# EAGLE board 00A-110-A (EAGLE 9.6.2)
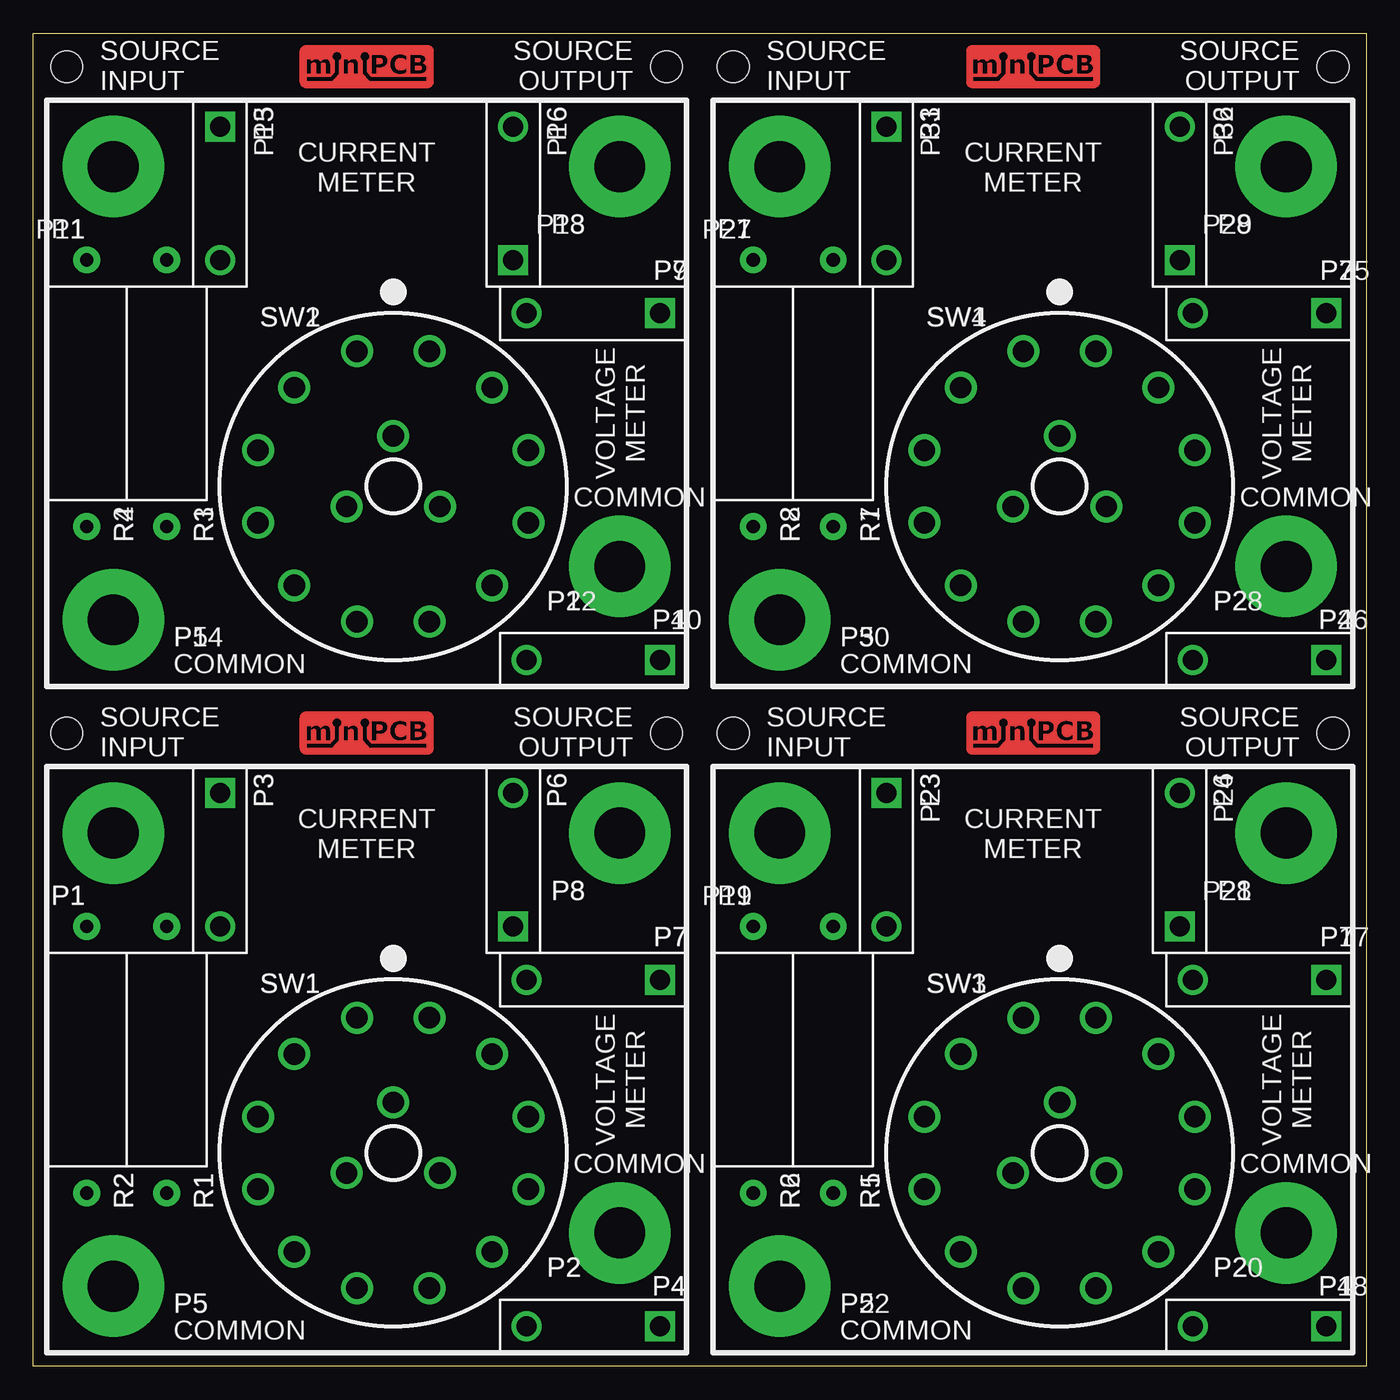
[diagram p0: board, top side]
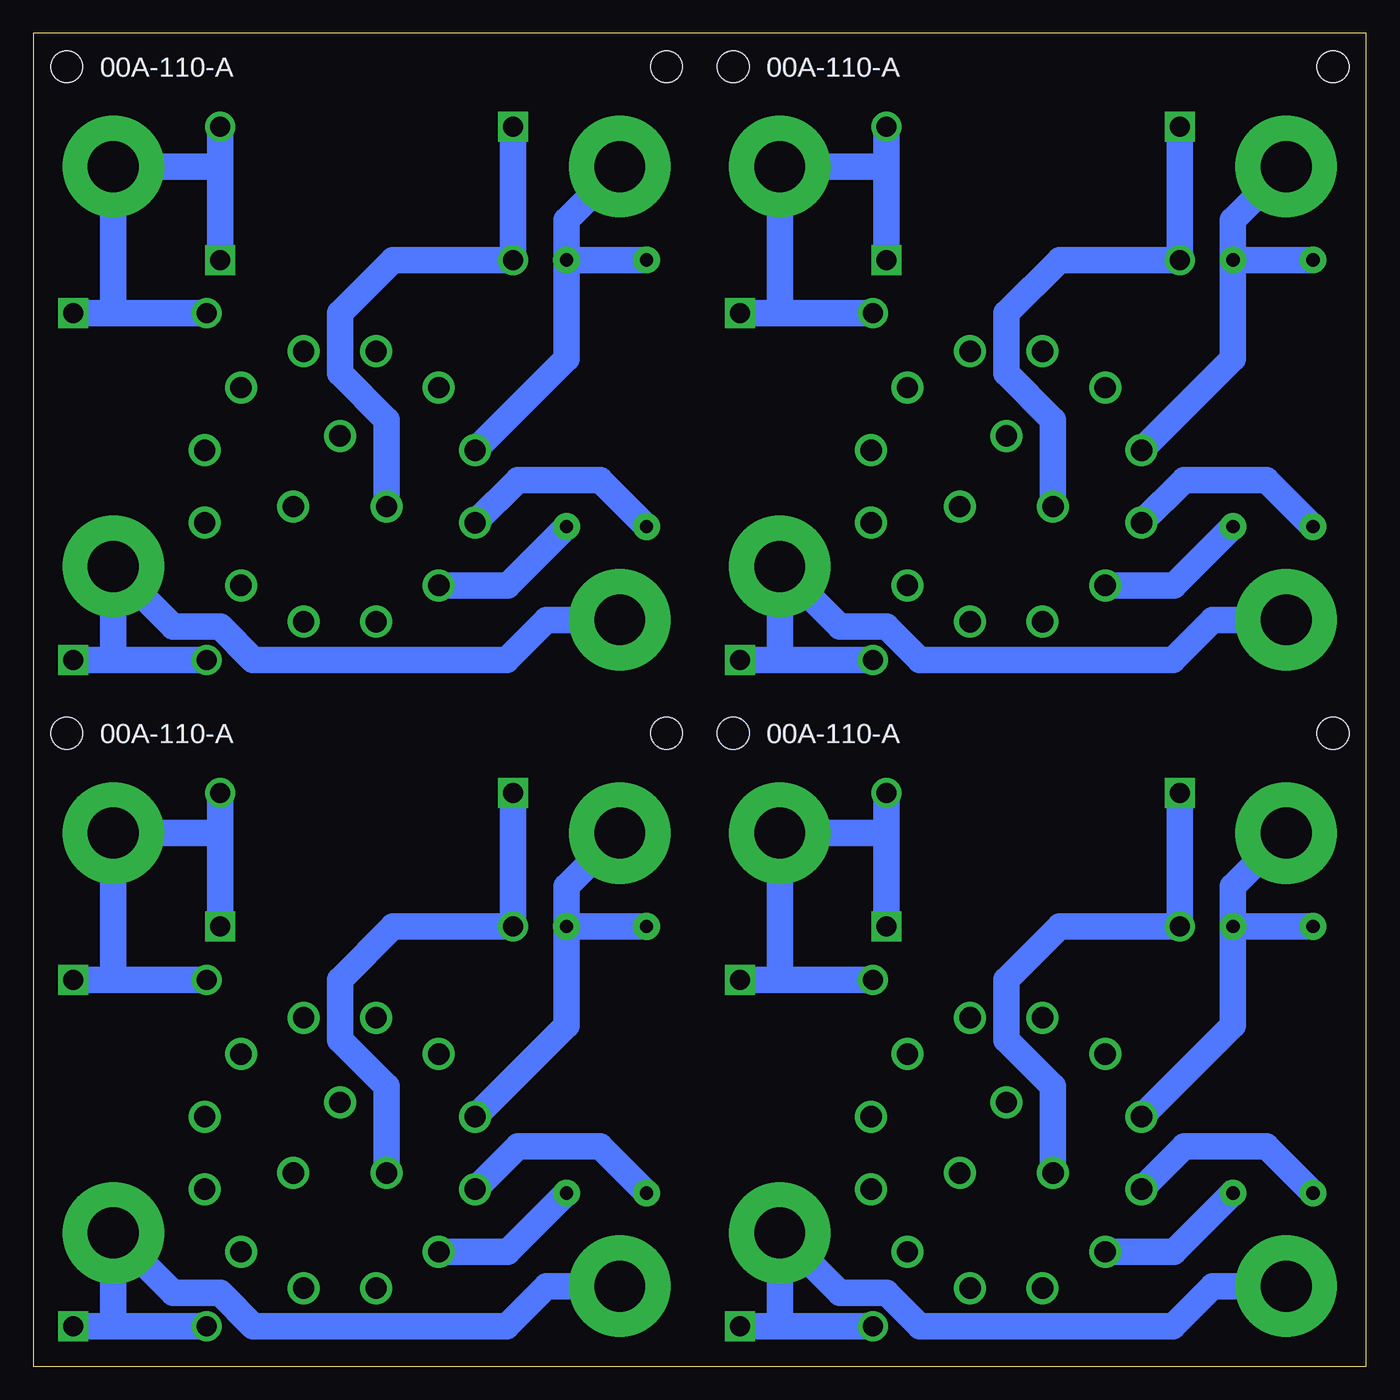
[diagram p1: board, bottom side, seen from below]

Size 100 x 100 mm. Coordinates in mm from the lower left corner, seen from the top.
Outline: 0,0 0,100 100,100 100,0 0,0
Copper layers (1*16): Top 0.035mm / dielectric 0.15mm / Bottom 0.035mm
Design rules "default": minimum track width 6mil, minimum drill 0.35mm, track to track 6mil, track to pad 6mil, pad to pad 6mil, via to via 6mil, smd to smd 6mil, copper to edge 40mil, drill to drill 6mil, minimum pad ring 10mil, minimum via ring 8mil, stop-mask expansion 4mil, vias tented up to drill 0mil, thermal gap 10mil

## Footprints (pad centres in the part's own frame; a part is rotated, then mirrored left to right if it is on the bottom)
BANANAPOST = drill 3.81 pad 7.62: 1 0,0
PINS_1_KE6060 = drill 1.5 square: 1 -5,0 | drill 1.5: 2 5,0
MINIPCB_0P_50X50MM = hole 2.4: 47.5,47.5; 2.5,47.5
R-THD-15MM = drill 1 pad 2: 1 -10,0; 2 10,0
SWITCH-ROTARY-3P4T = drill 1.6: 1 -2.718,-10.142; 2 -7.425,-7.425; 3 -10.142,-2.718; 4 -10.142,2.718; 5 -7.425,7.425; 6 -2.718,10.142; 7 2.718,10.142; 8 7.425,7.425; 9 10.142,2.718; 10 10.142,-2.718; 11 7.425,-7.425; 12 2.718,-10.142; A -3.5,-1.5; B 0,3.8; C 3.5,-1.5

## Placement (x,y rotation side)
E$1  [MINIPCB_PANEL_IMAGEFRAME]  -25,-35 0 top  (outside the outline)
P1  [BANANAPOST]  6,40 0 top
P2  [BANANAPOST]  44,10 0 top
P3  [PINS_1_KE6060]  14,38 270 top
P4  [PINS_1_KE6060]  42,3 180 top
P5  [BANANAPOST]  6,6 0 top
P6  [PINS_1_KE6060]  36,38 90 top
P7  [PINS_1_KE6060]  42,29 180 top
P8  [BANANAPOST]  44,40 0 top
P9  [PINS_1_KE6060]  42,79 180 top
P10  [PINS_1_KE6060]  42,53 180 top
P11  [BANANAPOST]  6,90 0 top
P12  [BANANAPOST]  44,60 0 top
P13  [BANANAPOST]  44,90 0 top
P14  [BANANAPOST]  6,56 0 top
P15  [PINS_1_KE6060]  14,88 270 top
P16  [PINS_1_KE6060]  36,88 90 top
P17  [PINS_1_KE6060]  92,29 180 top
P18  [PINS_1_KE6060]  92,3 180 top
P19  [BANANAPOST]  56,40 0 top
P20  [BANANAPOST]  94,10 0 top
P21  [BANANAPOST]  94,40 0 top
P22  [BANANAPOST]  56,6 0 top
P23  [PINS_1_KE6060]  64,38 270 top
P24  [PINS_1_KE6060]  86,38 90 top
P25  [PINS_1_KE6060]  92,79 180 top
P26  [PINS_1_KE6060]  92,53 180 top
P27  [BANANAPOST]  56,90 0 top
P28  [BANANAPOST]  94,60 0 top
P29  [BANANAPOST]  94,90 0 top
P30  [BANANAPOST]  56,56 0 top
P31  [PINS_1_KE6060]  64,88 270 top
P32  [PINS_1_KE6060]  86,88 90 top
PCB1  [MINIPCB_0P_50X50MM]  0,0 0 top
PCB2  [MINIPCB_0P_50X50MM]  0,50 0 top
PCB3  [MINIPCB_0P_50X50MM]  50,0 0 top
PCB4  [MINIPCB_0P_50X50MM]  50,50 0 top
R1  100  [R-THD-15MM]  10,23 270 top
R2  50  [R-THD-15MM]  4,23 270 top
R3  100  [R-THD-15MM]  10,73 270 top
R4  50  [R-THD-15MM]  4,73 270 top
R5  100  [R-THD-15MM]  60,23 270 top
R6  50  [R-THD-15MM]  54,23 270 top
R7  100  [R-THD-15MM]  60,73 270 top
R8  50  [R-THD-15MM]  54,73 270 top
SW1  [SWITCH-ROTARY-3P4T]  27,16 0 top
SW2  [SWITCH-ROTARY-3P4T]  27,66 0 top
SW3  [SWITCH-ROTARY-3P4T]  77,16 0 top
SW4  [SWITCH-ROTARY-3P4T]  77,66 0 top

## Library data of the parts
E$1 P1-P32 R1-R8 SW1-SW4 = minipcb
PCB1-PCB4 = minipcb; PART_NUMBER: 00A-110-A; REVISION: A

## Nets
N$1: P2.1 P4.1 P4.2 P5.1
N$2: P1.1 R1.1 R2.1 SW1.4
N$3: R1.2 SW1.2
N$4: R2.2 SW1.3
N$5: P6.1 P6.2 P7.1 P7.2 P8.1
N$6: P3.1 P3.2 SW1.A
N$7: P10.1 P10.2 P12.1 P14.1
N$8: P11.1 R3.1 R4.1 SW2.4
N$9: R3.2 SW2.2
N$10: R4.2 SW2.3
N$11: P9.1 P9.2 P13.1 P16.1 P16.2
N$12: P15.1 P15.2 SW2.A
N$13: P18.1 P18.2 P20.1 P22.1
N$14: P19.1 R5.1 R6.1 SW3.4
N$15: R5.2 SW3.2
N$16: R6.2 SW3.3
N$17: P17.1 P17.2 P21.1 P24.1 P24.2
N$18: P23.1 P23.2 SW3.A
N$19: P26.1 P26.2 P28.1 P30.1
N$20: P27.1 R7.1 R8.1 SW4.4
N$21: R7.2 SW4.2
N$22: R8.2 SW4.3
N$23: P25.1 P25.2 P29.1 P32.1 P32.2
N$24: P31.1 P31.2 SW4.A

## Tracks (layer width: path | path; a pad name or v marks a point on that pad's centre or on a via)
N$1
  Bottom 2: P5.1 11.5,6 14.5,3 33.5,3 36,5.5 39.5,5.5 P2.1 44,3 P4.2 P4.1
N$2
  Bottom 2: SW1.4 10,25.57 R1.1 | R1.1 10,36 P1.1 | R1.1 R2.1
N$3
  Bottom 2: R1.2 14.43,8.57 SW1.2
N$4
  Bottom 2: R2.2 7.5,16.5 13.64,16.5 SW1.3
N$5
  Bottom 2: P6.1 36,40 | 36,40 P6.2 | 36,40 P8.1 44,29 | P7.2 44,29 | 44,29 P7.1
N$6
  Bottom 2: SW1.A 23.5,21 27,24.5 27,29 23,33 P3.2 P3.1
N$7
  Bottom 2: P14.1 11.5,56 14.5,53 33.5,53 36,55.5 39.5,55.5 P12.1 44,53 P10.2 P10.1
N$8
  Bottom 2: SW2.4 10,75.58 R3.1 | R3.1 10,86 P11.1 | R3.1 R4.1
N$9
  Bottom 2: R3.2 14.43,58.58 SW2.2
N$10
  Bottom 2: R4.2 7.5,66.5 13.64,66.5 SW2.3
N$11
  Bottom 2: P16.1 36,90 | 36,90 P16.2 | 36,90 P13.1 44,79 | P9.2 44,79 | 44,79 P9.1
N$12
  Bottom 2: SW2.A 23.5,71 27,74.5 27,79 23,83 P15.2 P15.1
N$13
  Bottom 2: P22.1 61.5,6 64.5,3 83.5,3 86,5.5 89.5,5.5 P20.1 94,3 P18.2 P18.1
N$14
  Bottom 2: SW3.4 60,25.57 R5.1 | R5.1 60,36 P19.1 | R5.1 R6.1
N$15
  Bottom 2: R5.2 64.42,8.57 SW3.2
N$16
  Bottom 2: R6.2 57.5,16.5 63.64,16.5 SW3.3
N$17
  Bottom 2: P24.1 86,40 | 86,40 P24.2 | 86,40 P21.1 94,29 | P17.2 94,29 | 94,29 P17.1
N$18
  Bottom 2: SW3.A 73.5,21 77,24.5 77,29 73,33 P23.2 P23.1
N$19
  Bottom 2: P30.1 61.5,56 64.5,53 83.5,53 86,55.5 89.5,55.5 P28.1 94,53 P26.2 P26.1
N$20
  Bottom 2: SW4.4 60,75.58 R7.1 | R7.1 60,86 P27.1 | R7.1 R8.1
N$21
  Bottom 2: R7.2 64.42,58.58 SW4.2
N$22
  Bottom 2: R8.2 57.5,66.5 63.64,66.5 SW4.3
N$23
  Bottom 2: P32.1 86,90 | 86,90 P32.2 | 86,90 P29.1 94,79 | P25.2 94,79 | 94,79 P25.1
N$24
  Bottom 2: SW4.A 73.5,71 77,74.5 77,79 73,83 P31.2 P31.1

## Text on the board
tPlace: SOURCE / INPUT | SOURCE / OUTPUT | SOURCE / INPUT | SOURCE / OUTPUT | CURRENT / METER | CURRENT / METER | VOLTAGE / METER | VOLTAGE / METER | COMMON | COMMON | COMMON | COMMON | SOURCE / INPUT | SOURCE / OUTPUT | SOURCE / INPUT | SOURCE / OUTPUT | CURRENT / METER | CURRENT / METER | VOLTAGE / METER | VOLTAGE / METER | COMMON | COMMON | COMMON | COMMON
_tNames: P3 | P6 | P3 | P6 | P1 | P8 | P1 | P8 | P7 | P7 | SW1 | SW1 | R2 | R1 | R2 | R1 | P2 | P2 | P4 | P4 | P5 | P5 | P3 | P6 | P3 | P6 | P1 | P8 | P1 | P8 | P7 | P7 | SW1 | SW1 | R2 | R1 | R2 | R1 | P2 | P2 | P4 | P4 | P5 | P5